# EAGLE board CubeSat Power Supply Mk 3 (EAGLE 9.7.0)
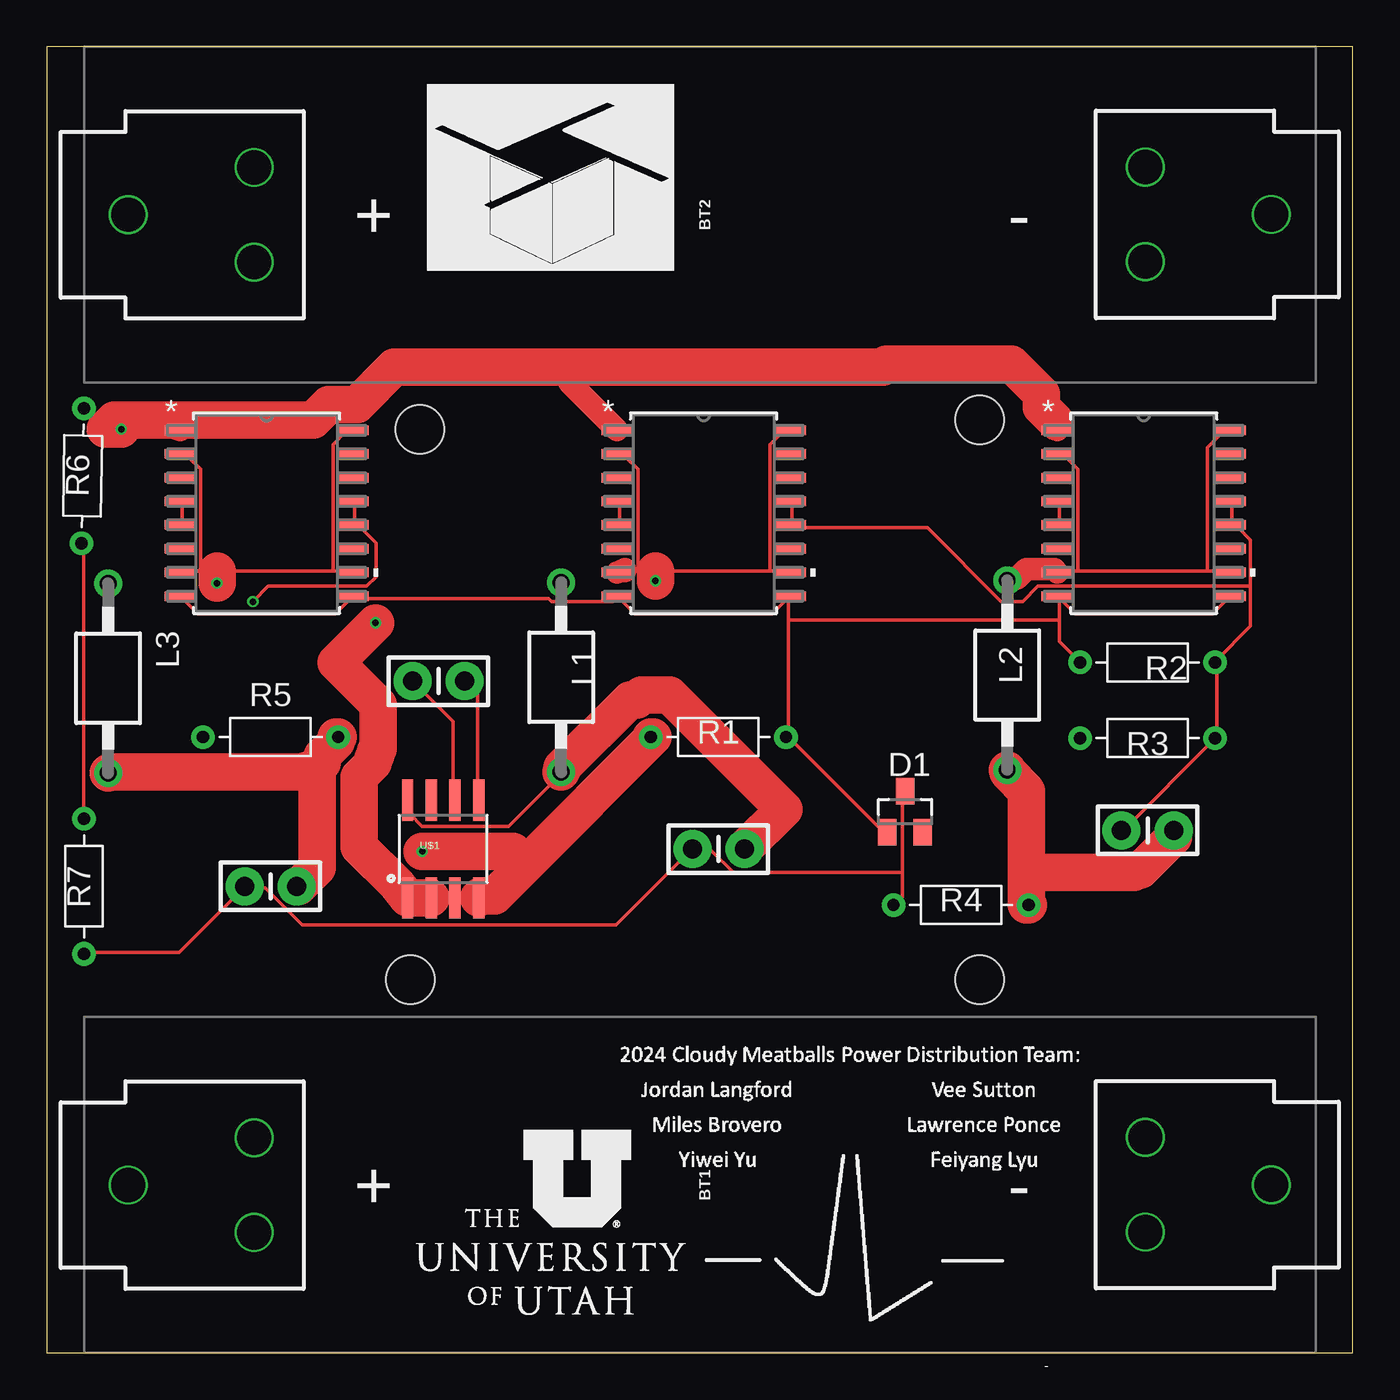
[diagram p0: board, top side]
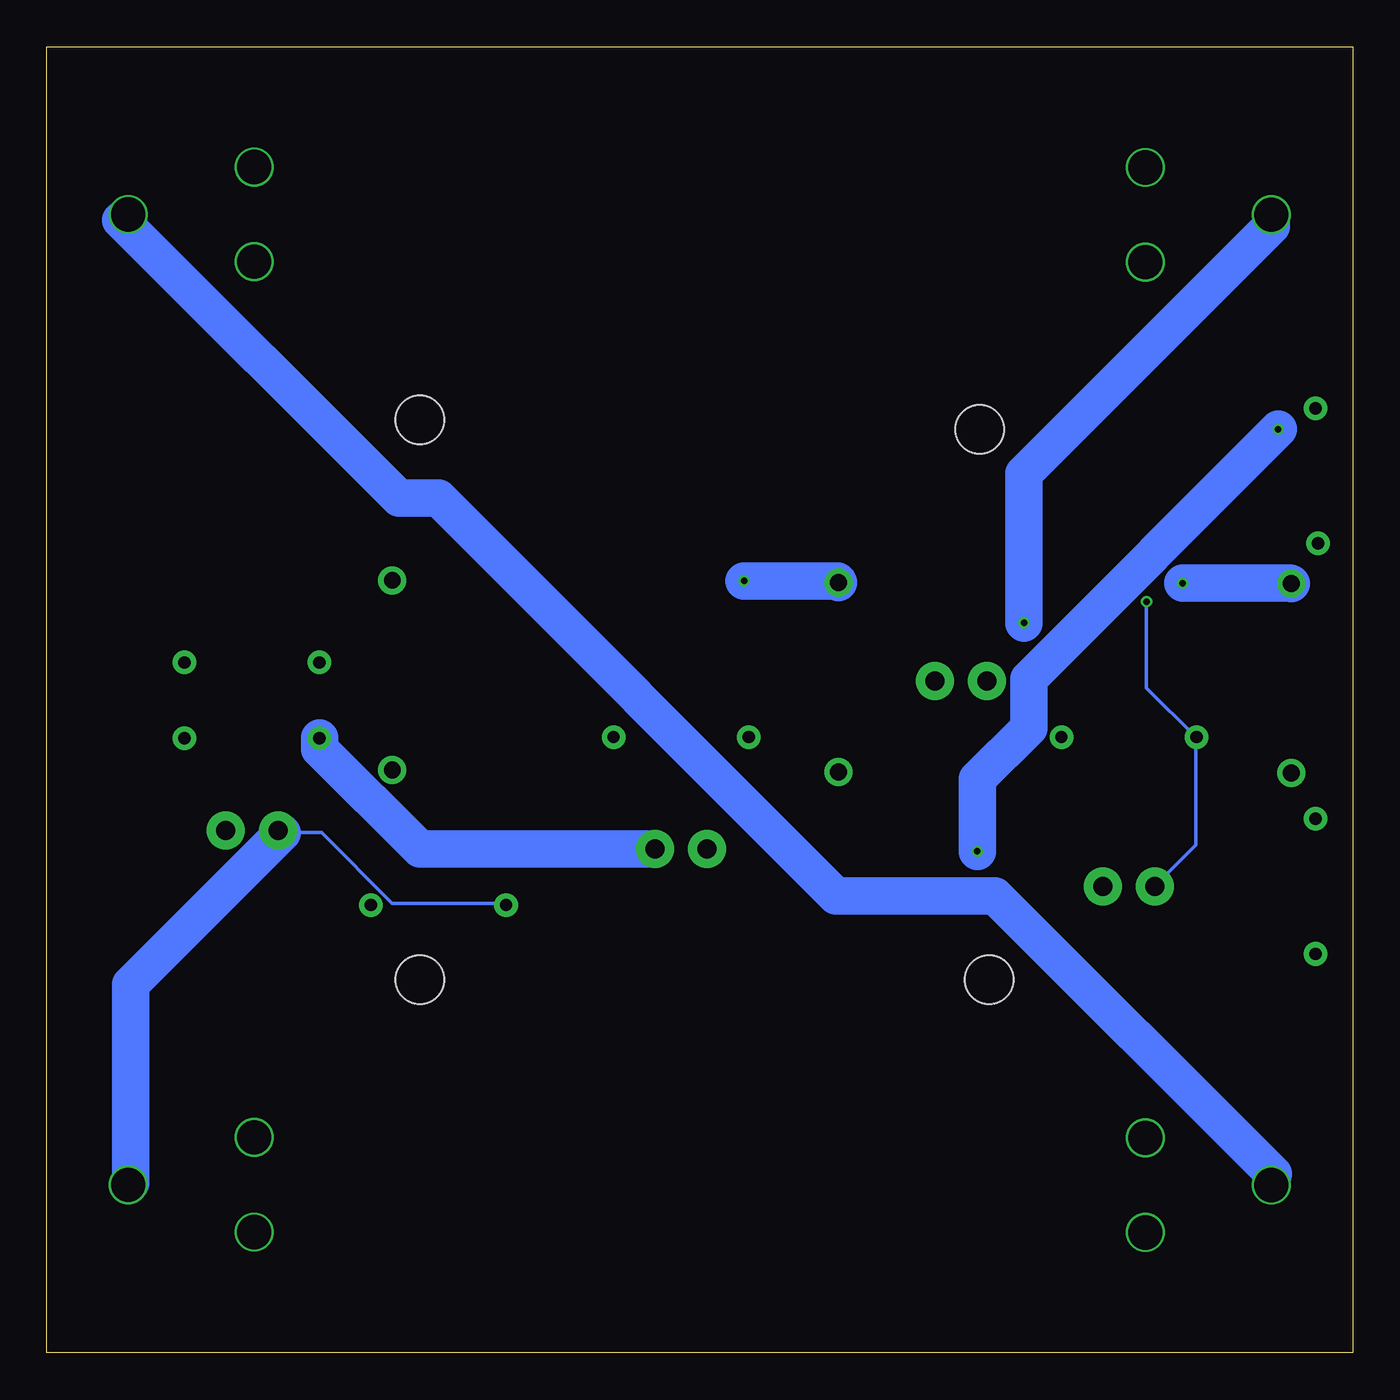
[diagram p1: board, bottom side, seen from below]

Size 70 x 70 mm. Coordinates in mm from the lower left corner, seen from the top.
Outline: 0,0 70,0 70,70 0,70 0,0
Copper layers (1*16): Top 0.035mm / dielectric 1.5mm / Bottom 0.035mm
Design rules "Fusion Electronics Design Rules": minimum track width 2mm, minimum drill 10mil, track to track 0.13mm, track to pad 0.13mm, pad to pad 0.13mm, via to via 0.13mm, smd to smd 0.13mm, copper to edge 5mil, drill to drill 5mil, minimum pad ring 5mil, minimum via ring 5mil, stop-mask expansion 4mil, vias tented up to drill 0mil, thermal gap 10mil
Holes 2.6 mm at 20,49.5 50,50 19.5,20 50,20

## Footprints (pad centres in the part's own frame; a part is rotated, then mirrored left to right if it is on the bottom)
BATTERY_18650-HOLDER = drill 1.829: GND@1 30.628,0.01; GND@2 23.88,2.55; GND@3 23.88,-2.53; PWR@1 -30.628,-0.01; PWR@2 -23.88,2.53; PWR@3 -23.88,-2.55
CAP-PTH-SMALL-KIT = drill 1.016 pad 2.032: 1 -1.397,0; 2 1.397,0
SOT23 = smd 1 x 1.4: 1 -0.95,-1.1; 2 0.95,-1.1; 3 0,1.1
BL01RN1A = drill 0.9 pad 1.5: 1 -5.08,0; 2 5.08,0
RESAD724W46L381D178B = drill 0.66 pad 1.26: 1 -3.62,0; 2 3.62,0
SO16WIDE_L2720W_STM-L = smd 1.676 x 0.508: 1 -4.636,4.445; 2 -4.636,3.175; 3 -4.636,1.905; 4 -4.636,0.635; 5 -4.636,-0.635; 6 -4.636,-1.905; 7 -4.636,-3.175; 8 -4.636,-4.445; 9 4.636,-4.445; 10 4.636,-3.175; 11 4.636,-1.905; 12 4.636,-0.635; 13 4.636,0.635; 14 4.636,1.905; 15 4.636,3.175; 16 4.636,4.445
SO08 = smd 0.61 x 2.21: 1 -1.905,-2.616; 2 -0.635,-2.616; 3 0.635,-2.616; 4 1.905,-2.616; 5 1.905,2.616; 6 0.635,2.616; 7 -0.635,2.616; 8 -1.905,2.616

## Placement (x,y rotation side)
BT1  [BATTERY_18650-HOLDER]  35,9 0 top
BT2  [BATTERY_18650-HOLDER]  35,61 0 top
C1  0.1uF  [CAP-PTH-SMALL-KIT]  36,27 180 top
C2  0.1uF  [CAP-PTH-SMALL-KIT]  59,28 180 top
C3  0.1uF  [CAP-PTH-SMALL-KIT]  12,25 180 top
C4  1n  [CAP-PTH-SMALL-KIT]  21,36 0 top
D1  [SOT23]  46,29 0 top
L1  BL01RN1A  [BL01RN1A]  27.57,36.21 270 top
L2  BL01RN1A  [BL01RN1A]  51.48,36.32 270 top
L3  BL01RN1A  [BL01RN1A]  3.29,36.15 270 top
R1  6.6K  [RESAD724W46L381D178B]  36,33 0 top
R2  3M  [RESAD724W46L381D178B]  59,37 180 top
R3  1M  [RESAD724W46L381D178B]  59,32.95 180 top
R4  1M  [RESAD724W46L381D178B]  49,24 0 top
R5  1M  [RESAD724W46L381D178B]  12,33 0 top
R6  1M  [RESAD724W46L381D178B]  1.93,47 89 top
R7  500K  [RESAD724W46L381D178B]  2,25 90 top
U1  L2720W13TRSO16WIDE_L2720W_STM-L  [SO16WIDE_L2720W_STM-L]  11.79,45 0 top
U2  L2720W13TRSO16WIDE_L2720W_STM-L  [SO16WIDE_L2720W_STM-L]  35.21,45 0 top
U3  L2720W13TRSO16WIDE_L2720W_STM-L  [SO16WIDE_L2720W_STM-L]  58.79,45 0 top
U$1  ACS723  [SO08]  21.25,27 0 top

## Library data of the parts
BT1 BT2 = SparkFun-Batteries; PROD_ID: BATT-12327; SF_SKU: PRT-13113
C1-C4 = SparkFun-Capacitors; PROD_ID: CAP-08370
D1 = diode
L1-L3 = inductors
R1-R7 = Resistor; CATEGORY: Resistor; SUB-CATEGORY: Fixed
U1-U3 = STM L2720W13TR; COPYRIGHT: Copyright (C) 2024 Ultra Librarian. All rights reserved.; MANUFACTURER_PART_NUMBER: L2720W13TR; MFR_NAME: STMicroelectronics
U$1 = SparkFun-Sensors; PART_#: ACS723ACS723LLCTR-05AB-T2; PROD_ID: IC-13872

## Nets
GND: BT1.GND@1 C1.2 C2.2 C3.2 D1.3 R2.1 R3.1 R4.1 R5.1 R7.1 U1.12 U1.13 U2.12 U2.13 U3.12 U3.13
N$1: U2.4 U2.5
N$2: U1.4 U1.5
N$3: U3.4 U3.5
N$4: L3.1 U1.2 U1.7 U1.10 U1.16
N$5: C3.1 L3.2 R5.2
N$5V_AUX: C2.1 L2.2 R4.2
N$5V_AUX_PREFILTER: L2.1 U3.2 U3.7 U3.10 U3.16
N$5V_MAIN: C1.1 L1.2 R3.2 U$1.8
N$5V_MAIN_PREFILTER: L1.1 U2.2 U2.7 U2.10 U2.16
N$5V_REF: D1.1 R1.2 R2.2 U1.8 U1.9 U2.8 U2.9 U3.8 U3.9
N$11: C4.2 U$1.5
N$AM_FIL: C4.1 U$1.6
N$BAT_CONN: BT1.PWR@1 BT2.GND@1
N$BATOUT: BT2.PWR@1 U$1.1 U$1.2
N$VMSUP: R6.1 R7.2
N$VS: R1.1 R6.2 U1.1 U2.1 U3.1 U$1.3 U$1.4

## Tracks (layer width: path | path; a pad name or v marks a point on that pad's centre or on a via)
GND  (via drill 0.35)
  Top 0.2: 39.93,45.54 39.93,44.38 U2.12 39.93,44.22 47.19,44.22 51.15,40.26 52.3,40.26 53.13,41.09 64.52,41.09 | 39.93,45.54 U2.13 39.93,45.54 | 16.5,45.7 U1.13 16.5,45.54 16.5,44.38 U1.12 16.5,44.22 16.83,44.22 17.66,43.4 17.66,41.58 17.16,41.09 11.88,41.09 v11.05,40.26 | R7.1 2.15,21.45 7.09,21.45 10.56,24.91 C3.2 10.72,24.91 11.71,24.91 13.7,22.93 30.52,22.93 34.48,26.89 C1.2 34.65,26.89 35.64,26.89 36.8,25.74 45.87,25.74 | 45.87,25.74 45.87,24.42 45.54,24.09 R4.1 | 45.87,25.74 45.87,30.03 D1.3 | U3.13 63.52,45.54 63.52,44.38 U3.12 63.52,44.22 63.85,44.22 64.52,43.56 64.52,41.09 | 64.52,41.09 64.52,38.94 62.7,37.12 R2.1 62.7,36.96 62.7,33 R3.1 62.53,32.84 57.75,28.05 C2.2
  Bottom 0.2: 8.41,33 8.41,27.23 10.56,25.08 C3.2 | 8.41,33 R5.1 8.41,33 | 65.5,9.07 BT1.GND@1 | 57.75,27.89 C2.2 57.59,27.89 55.27,27.89 51.48,24.09 45.54,24.09 R4.1 | v11.05,40.26 11.05,35.64 8.41,33
  Bottom 2: BT1.GND@1 65.5,9.12 65.5,19.75 57.38,27.88 C2.2
N$1
  Top 0.2: U2.5 30.69,44.38 30.69,45.54 U2.4
N$2
  Top 0.2: U1.5 7.26,44.38 7.26,45.54 U1.4
N$3
  Top 0.2: U3.5 54.28,44.38 54.28,45.54 U3.4
N$4  (via drill 0.35)
  Top 0.2: 8.25,41.91 7.26,41.91 U1.7 | 8.25,41.91 9.12,41.91 15.35,41.91 | 15.35,41.91 16.34,41.91 U1.10 | 8.25,41.91 8.25,47.35 7.59,48.02 7.26,48.02 U1.2 | 15.35,41.91 15.35,48.67 16,49.34 16.34,49.34 U1.16
  Top 2: v9.12,41.25 9.12,41.88 9.12,41.91
  Bottom 2: v9.12,41.25 3.38,41.25 L3.1
N$5
  Top 2: 14.5,31.38 14.75,31.62 14.75,32 15.5,32.75 15.5,33 R5.2 | 14.5,31.38 14.5,26 13.5,25 C3.1 | L3.2 3.38,31.12 13.62,31.12 14.5,31.38
N$5V_AUX
  Top 2: 52.5,25.75 52.5,30.12 51.5,31.12 L2.2 | 52.5,25.75 52.5,24 R4.2 | C2.1 60.38,28 60.38,27.62 58.62,25.88 58.38,25.88 58.25,25.75 53.38,25.75 52.5,25.75
N$5V_AUX_PREFILTER
  Top 0.2: 55.27,41.91 54.28,41.91 U3.7 | 55.27,41.91 62.2,41.91 | 62.2,41.91 63.36,41.91 U3.10 | 55.27,41.91 55.27,47.35 54.62,48.02 54.28,48.02 U3.2 | 62.2,41.91 62.2,48.51 63.03,49.34 63.36,49.34 U3.16
  Top 1.2: L2.1 51.5,41.5 52,41.5 52.5,42 54,42 U3.7
N$5V_MAIN
  Top 0.2: U$1.8 19.47,29.54 19.47,28.88 20.13,28.21 24.75,28.21 27.55,31.02 L1.2
  Top 2: L1.2 27.62,31.25 27.62,31.38 31.25,35 31.62,35 31.88,35.25 33.38,35.25 39.5,29.12 37.38,27 C1.1
  Bottom 0.2: 27.72,31.02 L1.2
  Bottom 2: R3.2 55.38,32.88 55.38,32.38 50,27 37.5,27 C1.1
N$5V_MAIN_PREFILTER  (via drill 0.35)
  Top 0.2: 30.69,41.91 31,41.91 31.68,41.91 | 31.68,41.91 32.62,41.91 38.77,41.91 | 38.77,41.91 39.77,41.91 U2.10 | 31.68,41.91 31.68,47.35 31.02,48.02 30.69,48.02 U2.2 | 38.77,41.91 38.77,48.67 39.44,49.34 39.77,49.34 U2.16
  Top 1.2: U2.7 31,42 31,41.91
  Top 2: v32.62,41.38 32.62,41.88 32.62,41.91
  Bottom 2: v32.62,41.38 27.62,41.38 L1.1
N$5V_REF
  Top 0.2: 54.28,39.27 54.28,38.12 55.27,37.12 R2.2 | 54.28,39.27 54.28,40.42 U3.8 55.12,39.59 62.46,39.59 U3.9 | 39.77,33 44.72,28.05 45.05,28.05 D1.1 | 39.77,33 R1.2 39.77,33 | U1.8 8.12,39.59 15.46,39.59 U1.9 16.5,40.42 26.89,40.42 27.06,40.26 30.36,40.26 30.52,40.42 U2.8 31.54,39.59 38.88,39.59 U2.9 39.77,40.42 39.77,39.27 | 39.77,39.27 39.77,33 | 39.77,39.27 54.28,39.27
N$11
  Top 0.2: U$1.5 23.1,29.7 23.1,35.31 22.44,35.97 C4.2
N$AM_FIL
  Top 0.2: U$1.6 21.78,29.7 21.78,33.83 19.64,35.97 C4.1
N$BAT_CONN
  Bottom 2: BT1.PWR@1 4.26,9.59 19.17,24.5 27.69,24.5 48.99,45.8 51.12,45.8 66.03,60.7 BT2.GND@1
N$BATOUT  (via drill 0.35)
  Top 0.2: 19.47,24.42 U$1.1 19.3,24.42 | 20.46,24.42 U$1.2
  Top 2: U$1.2 20.38,24.38 19.5,24.38 U$1.1 18.75,25.12 16.75,27.12 16.75,30.88 17.5,31.62 17.5,31.88 17.62,32 17.62,32.25 17.75,32.38 17.75,34.75 15.5,37 v17.62,39.12
  Bottom 2: v17.62,39.12 17.62,47.12 4.38,60.38 4.38,60.88 BT2.PWR@1
N$VMSUP
  Top 0.2: R6.1 1.98,43.23 1.98,28.71 R7.2
N$VS  (via drill 0.35)
  Top 0.2: 21.95,24.42 U$1.3 21.95,24.42 | 23.1,24.42 U$1.4 23.27,24.42 | 3.13,49.5 3.13,49.51 2.15,50.49 R6.2 | 21.95,24.42 22.27,24.42 23.25,24.5
  Top 1.2: U1.1 7,49.5 7,50 | 54,50 54,49.5 U3.1 | U2.1 28,52.02 28,52.82
  Top 2: 25.69,26.19 32.5,33 R1.1 | 25.69,26.19 24,24.5 23.25,24.5 U$1.4 | v4,49.5 3.12,49.5 | v20.12,26.88 25,26.88 25.69,26.19 | 3.12,49.5 3.13,49.51 | 3.12,49.5 3.62,50 7,50 14.29,50 15.12,50.83 16.64,50.83 18.63,52.82 28,52.82 44.82,52.82 45,53 51.69,53 53.32,51.37 53.32,50.68 54,50
  Bottom 2: v4,49.5 17.38,36.12 17.38,33.5 20.12,30.75 v20.12,26.88